# Altium PCB PCB四轴.PcbDoc
Units mm, origin at the board's own origin, x right, y up, seen from the top; angles counter-clockwise.
Board outline 100.25 x 100.25 mm, 2 copper layers (Top Layer, Bottom Layer); 60 components, 49 nets, 239 pads, 47 vias.
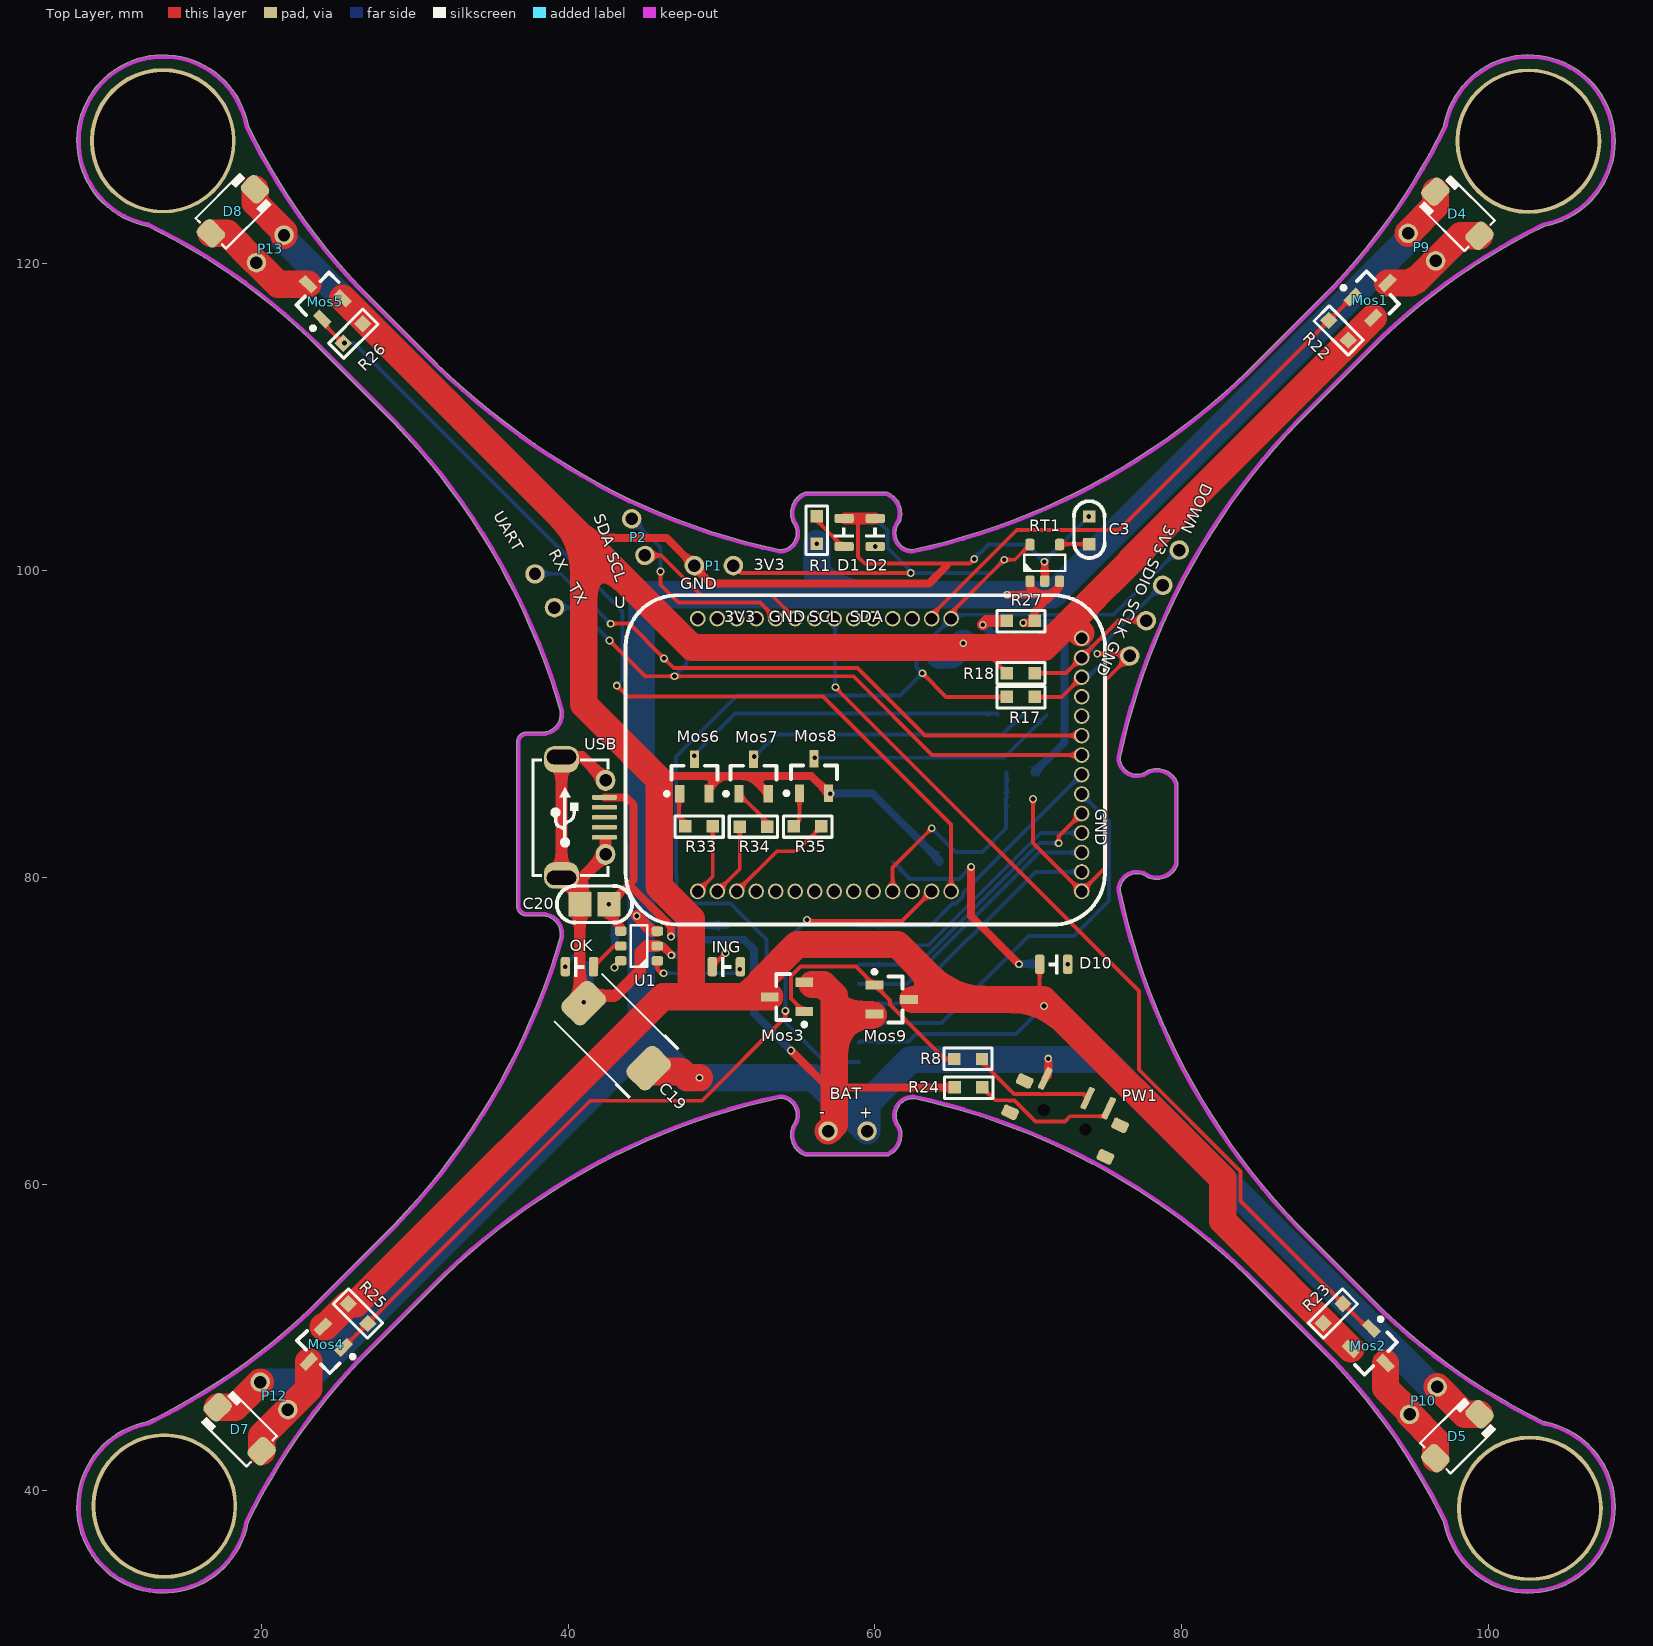
[diagram p0: Top Layer view]
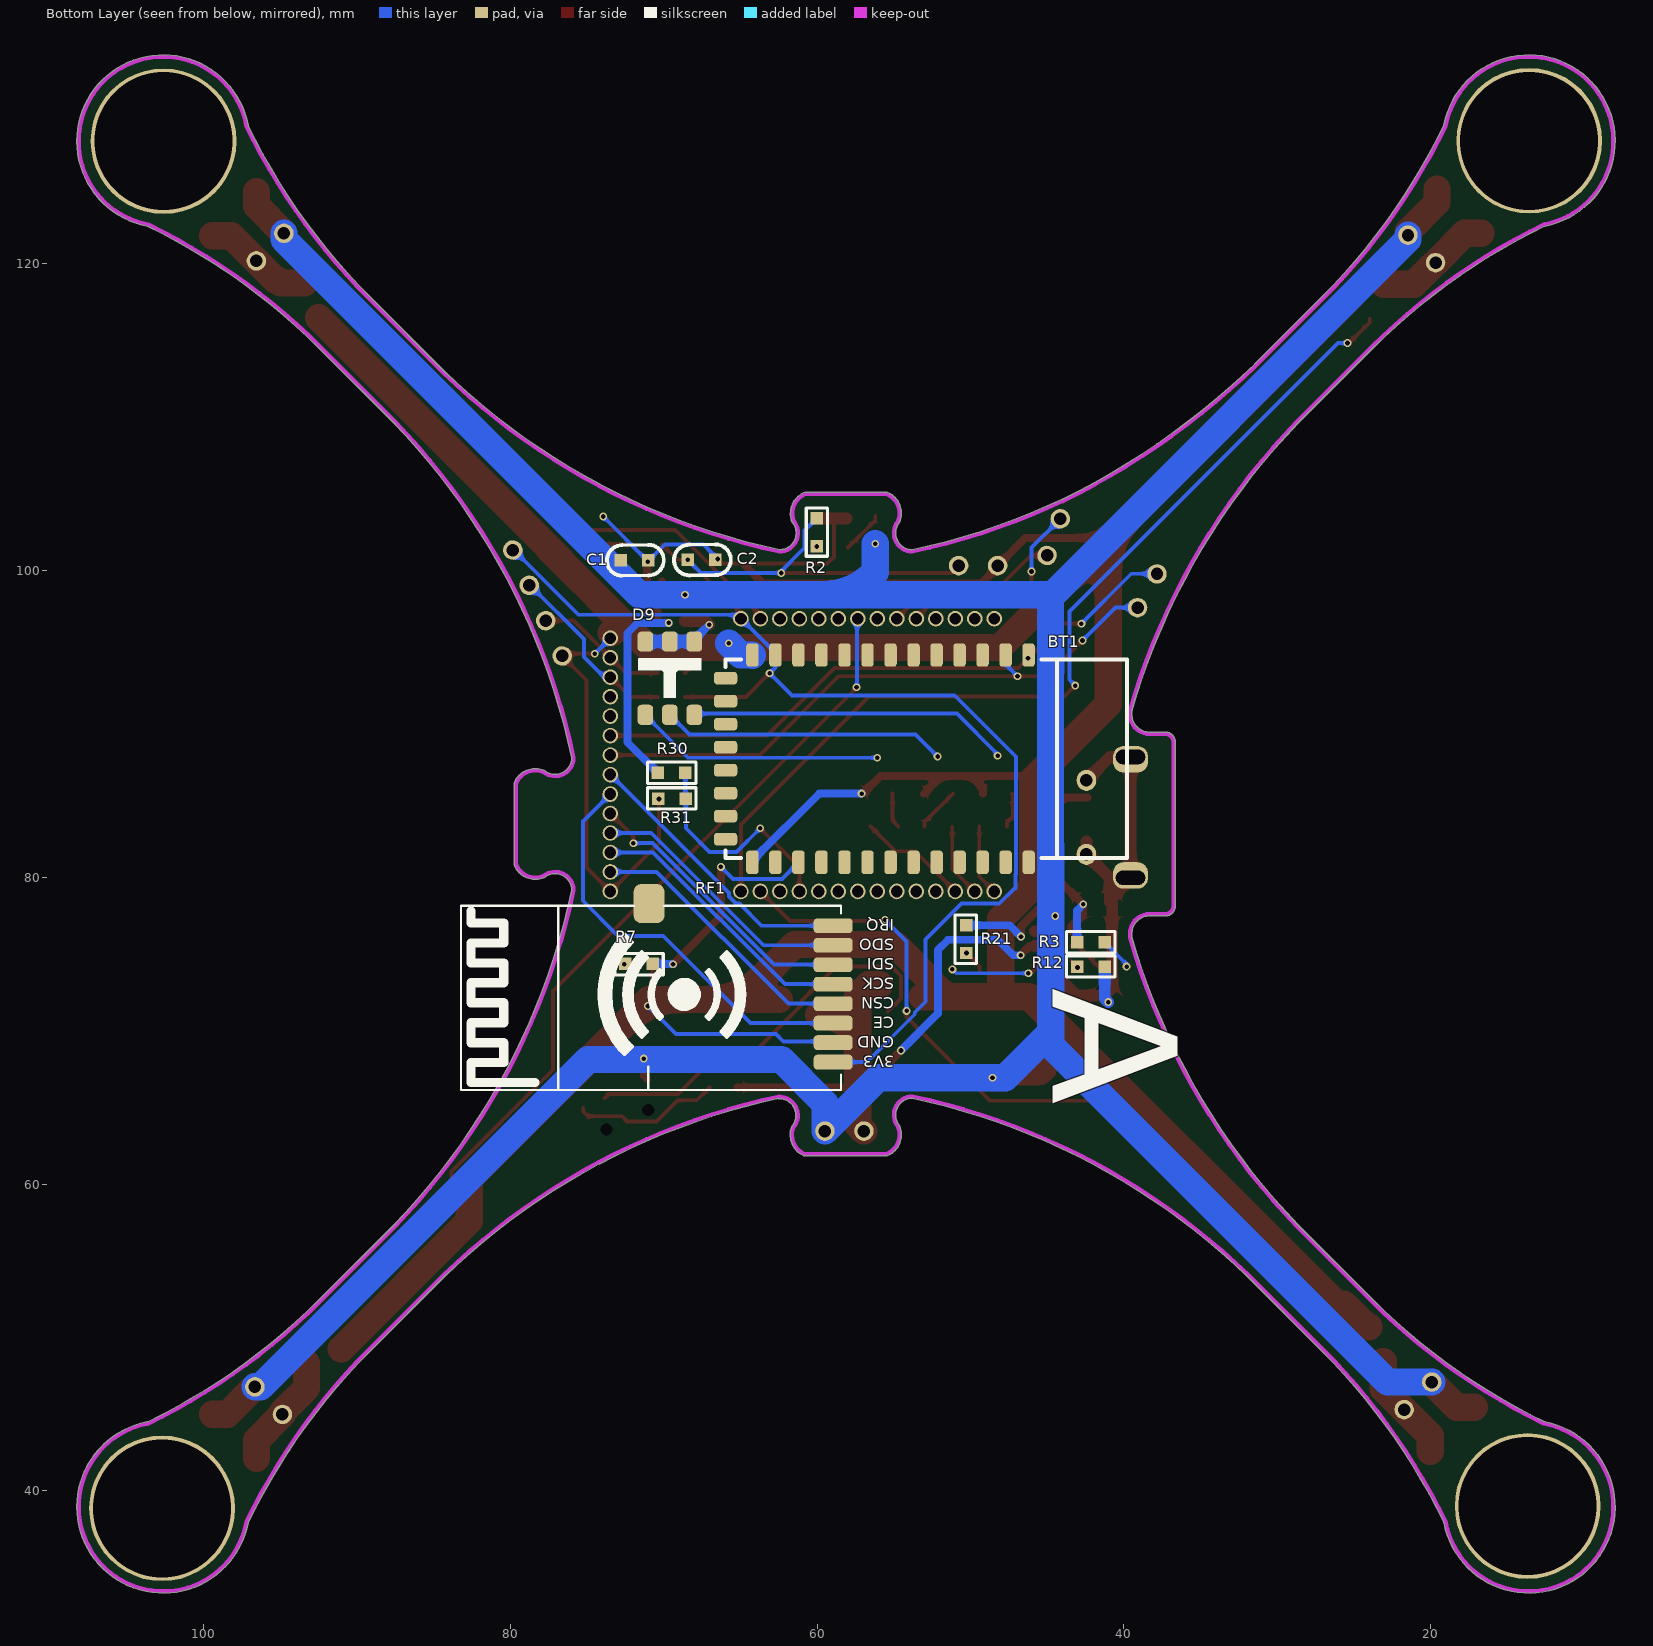
[diagram p1: Bottom Layer view, seen from below]

## Layer stack, top to bottom
Top Solder: solder mask 0.0102, Solder Resist, Dk 3.5
Top Layer: signal copper 0.0356
Dielectric1: dielectric 0.32, FR-4, Dk 4.8
Bottom Layer: signal copper 0.0356
Bottom Solder: solder mask 0.0102, Solder Resist, Dk 3.5

## Board outline
19.142,37.906 cw(c13.615,38.964) 12.568,44.493 cw(c12.641,44.389) 12.586,44.504 ccw(c-5.415,81.671) 23.786,52.469 ccw(c-5.415,81.671) 23.786,52.47 cw(c23.876,52.38) 23.787,52.47 23.786,52.47 28.635,57.319 28.634,57.318 ccw(c-3.645,88.488) 39.484,76.103 39.484,76.332 ccw(c38.342,76.332) 38.342,77.475 37.308,77.475 cw(c37.308,78.13) 36.652,78.13 36.652,88.798 cw(c37.308,88.798) 37.308,89.454 38.342,89.454 ccw(c38.342,90.597) 39.484,90.597 39.484,90.826 ccw(c-3.645,78.44) 28.634,109.611 ccw(c-3.645,78.44) 28.634,109.611 28.635,109.61 23.812,114.433 ccw(c-5.54,85.082) 12.561,122.437 cw(c13.615,127.964) 19.144,129.012 cw(c19.04,128.939) 19.155,128.994 ccw(c56.322,146.995) 27.12,117.794 ccw(c56.322,146.995) 27.121,117.794 ccw(c27.031,117.704) 27.12,117.794 27.121,117.794 31.469,113.445 31.468,113.446 ccw(c66.08,149.289) 43.944,104.65 cw(c43.949,104.522) 44.003,104.637 ccw(c63.139,145.225) 53.796,101.336 ccw(c53.783,102.432) 54.879,102.432 ccw(c53.783,102.432) 54.626,103.133 ccw(c53.783,102.432) 54.626,103.133 cw(c54.724,103.215) 54.605,103.169 cw(c55.989,103.704) 55.453,105.088 cw(c55.499,104.969) 55.5,105.096 60.742,105.096 cw(c60.743,104.969) 60.789,105.088 cw(c60.253,103.704) 61.737,103.704 cw(c60.253,103.704) 61.637,103.169 cw(c61.518,103.215) 61.615,103.133 ccw(c62.459,102.432) 62.435,101.336 ccw(c53.091,145.225) 84.262,112.946 ccw(c53.091,145.225) 84.262,112.946 84.261,112.945 89.11,117.794 cw(c89.2,117.704) 89.11,117.794 ccw(c59.758,147.146) 97.087,128.99 cw(c97.214,129) 97.088,129.024 cw(c102.615,127.964) 108.243,127.964 cw(c102.615,127.964) 103.663,122.435 cw(c103.589,122.539) 103.645,122.425 ccw(c121.646,85.257) 92.445,114.459 ccw(c121.646,85.257) 92.444,114.459 ccw(c92.354,114.549) 92.445,114.459 92.444,114.459 cw(c92.354,114.549) 92.444,114.458 92.444,114.459 87.595,109.61 87.596,109.611 cw(c119.875,78.44) 87.597,109.611 87.596,109.611 ccw(c119.875,78.44) 75.987,87.786 ccw(c77.083,87.796) 77.783,86.953 ccw(c77.083,87.796) 77.784,86.954 77.783,86.953 cw(c77.866,86.856) 77.82,86.974 cw(c78.355,85.591) 79.739,86.127 cw(c79.62,86.081) 79.747,86.081 cw(c79.62,86.081) 79.747,86.069 79.747,80.86 cw(c79.62,80.848) 79.747,80.848 cw(c79.62,80.848) 79.739,80.802 cw(c78.355,81.338) 77.82,79.954 cw(c77.866,80.073) 77.783,79.976 cw(c77.083,79.132) 77.784,79.975 77.783,79.976 ccw(c77.083,79.132) 75.987,79.143 ccw(c119.875,88.488) 87.596,57.318 ccw(c119.875,88.488) 87.597,57.317 87.595,57.319 92.444,52.47 cw(c92.354,52.38) 92.445,52.469 ccw(c121.796,81.822) 103.64,44.493 cw(c103.65,44.366) 103.674,44.491 cw(c102.615,38.964) 108.243,38.964 cw(c102.615,38.964) 97.086,37.917 cw(c97.19,37.991) 97.076,37.935 ccw(c59.908,19.934) 89.11,49.135 ccw(c59.908,19.934) 89.11,49.135 84.261,53.984 84.262,53.984 ccw(c53.091,21.704) 62.517,65.576 cw(c62.473,65.695) 62.473,65.568 ccw(c62.473,64.471) 61.629,63.771 ccw(c62.473,64.471) 61.63,63.77 61.629,63.771 cw(c61.532,63.689) 61.651,63.735 cw(c60.267,63.199) 61.751,63.199 cw(c60.267,63.199) 60.914,61.864 cw(c60.831,61.96) 60.831,61.833 55.51,61.833 cw(c55.499,61.96) 55.453,61.841 cw(c55.989,63.224) 54.605,63.76 cw(c54.724,63.714) 54.626,63.796 ccw(c53.783,64.497) 54.879,64.497 ccw(c53.783,64.497) 53.794,65.593 ccw(c63.139,21.704) 31.969,53.984 ccw(c63.139,21.704) 31.968,53.983 31.97,53.984 27.121,49.135 ccw(c27.031,49.226) 27.121,49.136 27.121,49.135 ccw(c56.472,19.784) 27.12,49.135 ccw(c56.472,19.784) 19.144,37.939 cw(c19.017,37.93) 19.144,37.93 cw(c19.017,37.93)

## Design rules (kind name [scope] priority, off if disabled: settings)
Clearance [All] p1: gap=0.152 ignorepadtopadclearanceinfootprint=FALSE except(0: Arc-Hole Track-Hole SMDPad-Hole THPad-Hole Via-Hole Fill-Hole Poly-Hole Region-Hole Text-Hole)
PlaneConnect [All] p1: planeconnectstyle=Direct reliefexpansion=0.508 reliefentries=4 reliefconductorwidth=0.254 reliefairgap=0.254
PolygonConnect [All] p1: connectstyle=Direct reliefconductorwidth=0.254 reliefentries=4 polygonreliefangle="90 Angle" airgapwidth=0.254
RoutingVias [All] p1: holewidth=0.305 width=0.508 viastyle="Through Hole" minholewidth=0.305 minwidth=0.508 maxholewidth=2.54 maxwidth=1.27
SilkToSilkClearance [All] p1: silktosilkclearance=0.152
SilkToSolderMaskClearance [IsPad] p1: minsilkscreentomaskgap=0.152 clearancetoexposedcopper=TRUE
SolderMaskExpansion [All] p1: expansion=0.102
Width [All] p1: maxlimit=2.54 minlimit=0.152 preferedwidth=0.254 minimp=50.000000 maximp=50.000000 favimp=50.000000
27 further rules are at their usual default settings.

## Classes and differential pairs
component class PCB四轴: BT1 CC1 D9 D10 DOWN Mos6 Mos7 Mos8 MPU1 P1 P2 R7 R17 R18 R27 R30 R31 R33 R34 R35 RF1 U UART
component class PCB四轴接口: BAT C1 C2 C3 C19 C20 D1 D2 D4 D5 D7 D8 ING Mos1 Mos2 Mos3 Mos4 Mos5 Mos9 OK P9 P10 P12 P13 PW1 R1 R2 R3 R8 R12 R21 R22 R23 R24 R25 R26 RT1 U1 USB

## Components (designator, comment, footprint, x,y, rotation, side; value= is the part's Value field where it differs from the comment)
BAT "HDR1x2_2.54" HDR1X2_2.54_90 59.487,63.449 r270 top
BT1 "Bluetooth_HC05" Bluetooth_HC05 65.964,87.721 r270 bottom
C1 "Cap_0603" CAP_0603 71.831,100.686 r0 bottom value=1u
C2 "Cap_0603" CAP_0603 67.462,100.711 r0 bottom value=0.1u
C3 "Cap_0603" CAP_0603 73.939,102.667 r270 top value=22n
C19 "Cap_Tan_2917" CAP_TAN_D2917 43.129,69.672 r135 top value=?F
C20 "Cap_0805" CAP_0805 41.749,78.207 r0 top value=?F
D1 "LED_0805" LED_0805_YELLOW 57.988,102.464 r90 top
D2 "LED_0805" LED_0805_YELLOW 60.02,102.464 r90 top
D4 "Diode_SMA" DO-214AC 97.968,123.241 r135 top value=SS34
D5 "Diode_SMA" DO-214AC 97.968,43.561 r45 top value=SS34
D7 "Diode_SMA" DO-214AC 18.593,44.018 r135 top value=SS34
D8 "Diode_SMA" DO-214AC 18.161,123.393 r45 top value=SS34
D9 "LED_5050_RGB" LED_5050_6P 69.596,92.964 r90 bottom
D10 "LED_0805" LED_0805_BLUE 71.653,74.32 r180 top
DOWN "HDR1x4_2.54" HDR1X4_2.54_90 79.832,101.321 r335 top
ING "LED_0805" LED_0805_RED 50.317,74.168 r0 top
Mos1 "MOSFET N" Nmos_SOT23 92.608,117.932 r45 top
Mos2 "MOSFET N" Nmos_SOT23 92.481,49.124 r315 top
Mos3 "MOSFET N" Nmos_SOT23 54.272,72.197 r180 top
Mos4 "MOSFET N" Nmos_SOT23 23.901,49.225 r225 top
Mos5 "MOSFET N" Nmos_SOT23 23.854,117.85 r135 top
Mos6 "MOSFET N" Nmos_SOT23 48.235,86.563 r90 top
Mos7 "MOSFET N" Nmos_SOT23 52.095,86.563 r90 top
Mos8 "MOSFET N" Nmos_SOT23 56.032,86.589 r90 top
Mos9 "MOSFET N" Nmos_SOT23 61.094,72.024 r0 top
OK "LED_0805" LED_0805_GREEN 40.742,74.168 r0 top
P1 "HDR1x2_2.54" HDR1X2_2.54_180 50.775,100.305 r270 top
P2 "HDR1x2_2.54" HDR1X2_2.54_180 44.145,103.353 r20 top
P9 "HDR1x2_2.54" HDR1X2_2.54_180 94.749,121.963 r45 top
P10 "HDR1x2_2.54" HDR1X2_2.54_180 96.64,46.779 r315 top
P12 "HDR1x2_2.54" HDR1X2_2.54_180 19.939,47.092 r45 top
P13 "HDR1x2_2.54" HDR1X2_2.54_180 21.488,121.844 r315 top
PW1 "SwitchSPDT_2.8x6.6_90" SwitchSPDT_2.8X6.6_90 72.365,64.186 r335 top
R1 "Res_0603" RES_0603 54.127,102.667 r90 top value=1K
R2 "Res_0603" RES_0603 57.937,102.438 r270 bottom value=1K
R3 "Res_0603" RES_0603 42.113,77.826 r180 bottom value=1.6K
R7 "Res_0603" RES_0603 71.653,72.263 r0 bottom value=500R
R8 "Res_0603" RES_0603 66.116,70.231 r0 top value=10K
R12 "Res_0603" RES_0603 42.113,76.251 r180 bottom value=1.6K
R17 "Res_0603" RES_0603 69.469,89.662 r180 top value=10K
R18 "Res_0603" RES_0603 69.469,91.211 r180 top value=10K
R21 "Res_0603" RES_0603 52.375,75.997 r90 bottom value=1.6K
R22 "Res_0603" RES_0603 88.724,114.198 r135 top value=10K
R23 "Res_0603" RES_0603 88.422,53.064 r45 top value=10K
R24 "Res_0603" RES_0603 66.065,64.211 r180 top value=10K
R25 "Res_0603" RES_0603 27.812,52.992 r315 top value=10K
R26 "Res_0603" RES_0603 27.433,113.92 r225 top value=10K
R27 "Res_0603" RES_0603 69.469,94.615 r180 top value=?K
R30 "Res_0603" RES_0603 69.52,84.734 r0 bottom value=10K
R31 "Res_0603" RES_0603 69.418,87.198 r180 bottom value=10K
R33 "Res_0603" RES_0603 48.489,81.229 r180 top value=?K
R34 "Res_0603" RES_0603 52.133,85.369 r0 top value=?K
R35 "Res_0603" RES_0603 55.575,81.229 r180 top value=?K
RF1 "NRF2401_优信" NRF24L01_YOUXIN 68.544,72.527 r0 bottom locked
RT1 "RT9193" SOT23-5 71.069,100.482 r90 top
U "Fly_Control_Core" FLY_CONTROL_CORE 58.776,89.51 r0 top locked
U1 "TP4059" SOT23-6 44.628,75.514 r180 top
UART "HDR1x2_2.54" HDR1X2_2.54_180 37.846,99.761 r30 top
USB "USB_Micro" USB_Micro-AB 39.827,83.896 r90 top

## Footprints (in the part's own frame and the unit in brackets; to place one, negate y for a bottom-side part, rotate by r counter-clockwise, add the part's x,y. Pads: shape width x height; smd on the part's side, far side on the other; paste and mask are expansions set on the pad)
Bluetooth_HC05 [mil]
  rrect50% 60x32 smd: 1(-265.91,777.56) 2(-265.91,718.5) 3(-265.91,659.45) 4(-265.91,600.39) 5(-265.91,541.34) 6(-265.91,482.28) 7(-265.91,423.23) 8(-265.91,364.17) 9(-265.91,305.12) 10(-265.91,246.06) 11(-265.91,187.01) 12(-265.91,127.95) 13(-265.91,68.9) 22(265.91,68.9) 23(265.91,127.95) 24(265.91,187.01) 25(265.91,246.06) 26(265.91,305.12) 27(265.91,364.17) 28(265.91,423.23) 29(265.91,482.28) 30(265.91,541.34) 31(265.91,600.39) 32(265.91,659.45) 33(265.91,718.5) 34(265.91,777.56)
  rrect50% 32x60 smd: 14(-206.69,0) 15(-147.64,0) 16(-88.58,0) 17(-29.53,0) 18(29.53,0) 19(88.58,0) 20(147.64,0) 21(206.69,0)
  silkscreen extent -255,0 255,1030, body extent -276,0 276,1103, height 93
CAP_0603 [mil]
  rect 32x32 smd: 1(-33,1) 2(38,1)
  silkscreen extent -72,-38 73,41, body extent -33,-15 30,17, height 31
CAP_0805 [mm]
  rect 1.5x1.6 smd: 1(-0.977,0.025) 2(0.923,0.025)
  silkscreen extent -2.48,-1.17 2.42,1.23, body extent -1.08,-0.64 0.92,0.62, height 1
CAP_TAN_D2917 [mil]
  rrect50% 80x106 smd: 1(-118,0) 2(118,0)
  silkscreen extent -138,-92 138,92, body extent -150,-78 150,78, height 122
DO-214AC [mil] "SMA"
  rrect50% 55x65 smd: 1(-80,0) 2(80,0)
  silkscreen extent -80,-55 80,55, body extent -98,-53 98,53, height 85
FLY_CONTROL_CORE [mil]
  round 40 hole 30: 1(-406.44,288.88) 2(-356.44,288.88) 3(-306.44,288.88) 4(-256.44,288.88) 5(-206.44,288.88) 6(-156.44,288.88) 7(-106.44,288.88) 8(-56.44,288.88) 9(-6.44,288.88) 10(43.56,288.88) 11(93.56,288.88) 12(143.56,288.88) 13(193.56,288.88) 14(243.56,288.88) 15(-406.44,-411.11) 16(-356.44,-411.11) 17(-306.44,-411.11) 18(-256.44,-411.11) 19(-206.44,-411.12) 20(-156.44,-411.12) 21(-106.44,-411.12) 22(-56.44,-411.12) 23(-6.44,-411.12) 24(43.56,-411.12) 25(93.56,-411.12) 26(143.56,-411.12) 27(193.56,-411.12) 28(243.56,-411.12) 29(578.56,238.88) 30(578.56,188.88) 31(578.56,138.88) 32(578.56,88.88) 33(578.56,38.88) 34(578.56,-11.12) 35(578.55,-61.12) 36(578.55,-111.12) 37(578.55,-161.12) 38(578.55,-211.12) 39(578.55,-261.12) 40(578.55,-311.12) 41(578.55,-361.12) 42(578.55,-411.12)
  silkscreen extent -591,-496 639,349, body extent -598,-502 642,353, height 197
HDR1X2_2.54_90 [mil]
  round 50 hole 32: 1(0,0) 2(0,-100)
  body extent -15,-146 424,46, height 99
HDR1X2_2.54_180 [mil]
  round 50 hole 32: 1(0,0) 2(0,-100)
  body extent -49,-150 49,50, height 323
HDR1X4_2.54_90 [mil]
  round 50 hole 32: 1(0,0) 2(0,-100) 3(0,-200) 4(0,-300)
  body extent -15,-346 424,46, height 99
LED_0805_BLUE [mil]
  rrect50% 24x50 smd: 1(-36,0) 2(36,0)
  silkscreen extent -12,-24 12,24, body extent -40,-25 40,25, height 43
LED_0805_GREEN [mil]
  rrect50% 24x50 smd: 1(-36,0) 2(36,0)
  silkscreen extent -12,-24 12,24, body extent -40,-25 40,25, height 43
LED_0805_RED [mil]
  rrect50% 24x50 smd: 1(-36,0) 2(36,0)
  silkscreen extent -12,-24 12,24, body extent -40,-25 40,25, height 43
LED_0805_YELLOW [mil]
  rrect50% 24x50 smd: 1(-36,0) 2(36,0)
  silkscreen extent -12,-24 12,24, body extent -40,-25 40,25, height 43
LED_5050_6P [mil]
  rrect50% 52x40 smd: 1(-94,62.99) 2(-94,0) 3(-94,-62.99) 4(94,-62.99) 5(94,0) 6(94,62.99)
  silkscreen extent -50,-80 50,80, body extent -104,-98 104,98, height 63
Nmos_SOT23 [mm]
  rect 1.15x0.6 smd: D(1.125,0) G(-1.125,0.95) S(-1.125,-0.95)
  silkscreen extent -1.25,-1.5 0.7,1.92, body extent -0.7,-1.5 0.7,1.5, height 1.14
NRF24L01_YOUXIN [mil]
  rrect50% 100x38 smd: 1(-377.57,180.39) 2(-377.57,130.39) 3(-377.57,80.39) 4(-377.57,30.39) 5(-377.57,-19.61) 6(-377.57,-69.61) 7(-377.57,-119.61) 8(-377.57,-169.61)
  rrect50% 80x100 smd: 9(94.68,-226.31)
  silkscreen extent -398,-221 577,252, body extent -383,-235 582,265, height 46
RES_0603 [mil]
  rect 32x32 smd: 1(-37,-82) 2(34,-82)
  silkscreen extent -64,-109 60,-54, body extent -31,-98 31,-66, height 18
SOT23-5 [mil]
  rrect50% 30x24 smd: 1(-47,38) 2(-47,0) 3(-47,-38) 4(47,-38) 5(47,38)
  silkscreen extent -21,-53 21,53, body extent -55,-57 55,57, height 57
SOT23-6 [mil]
  rrect50% 30x24 smd: 1(-47,38) 2(-47,0) 3(-47,-38) 4(47,-38) 5(47,0) 6(47,38)
  silkscreen extent -21,-53 21,53, body extent -55,-57 55,57, height 57
SwitchSPDT_2.8X6.6_90 [mil]
  rrect50% 42x30 smd: 0(-135,-42) 0(-135,47) 0(135,-42) 0(135,47)
  round 10 hole 31.5: 0(-59.06,0) 0(59.06,0)
  rrect50% 16x60 smd: 1(90,75) 2(30,75) 3(-90,75)
  body extent -152,-111 151,86, height 55
USB_Micro-AB [mil]
  rrect80% 68x90 hole 37 slot 75 at 90 deg copper offset 6,0 mask+0: 0(-155,10)
  oval 54x50 hole 32 mask+0: 0(-95,-103) 0(95,-103)
  rrect80% 68x90 hole 37 slot 75 at 90 deg copper offset -6,0 mask+0: 0(155,10)
  rrect50% 12x64 smd: 1(51.18,-100) 2(25.59,-100) 3(0,-100) 4(-25.59,-100) 5(-51.18,-100)
  silkscreen extent -150,-113 150,86, body extent -161,-109 161,104, height 108

## Part data
BAT DOWN P1 P2 UART: "Header"
BT1: "Module"
C1 C2 C3 C19 C20: "Capacitor"
D1 D2 D9 D10 ING OK: "LED"
D4 D5 D7 D8: "Diode"
Mos1 Mos2 Mos3 Mos4 Mos5 Mos6 Mos7 Mos8 Mos9: "MOS SOT23"
P9 P10 P12 P13: library part HDR1x2_2.54T, "Header"
PW1: "Switch"
R1 R2 R3 R7 R8 R12 R17 R18 R21 R22 R23 R24 R25 R26 R27 R30 R31 R33 R34 R35: "Resistor"
RT1: "Power"
USB: "USB"

## Free pads (board coordinates)
  round 9.5 hole 9: 0(13.589,127.991) 0(13.691,39.014) 0(102.591,127.965) 0(102.692,38.862)

## Via types
v1: diameter 0.508, hole 0.305, Top Layer to Bottom Layer, 47 vias

## Nets (pads, with @x,y where several pads share a name; then routed paths per layer and width w, separated by ;. In a path a pad name is that pad's centre, name@x,y a point inside that pad or via, vN(x,y) a via of type N, cw(c..) or ccw(c..) an arc to the next point about the centre after c; other vN are vias at no path point)
3V3: BT1.12 C2.2 DOWN.1 P1.1 R2.1 R17.2 RF1.1 RT1.5 U.14 | length 103.5
  Top Layer w0.254: P1.1 51.257,99.822 v1(62.332,99.822) ; v1(63.094,93.294) 64.643,91.745 R17.2 ; U.14 64.962,97.22 v1(68.428,100.686) 69.113,100.686 RT1.5
  Bottom Layer w0.254: RF1.1 56.751,67.945 53.632,71.064 53.632,71.183 52.934,71.882 52.934,75.946 50.6,78.28 48.126,78.28 47.107,79.299 47.066,79.299 47.066,80.17 47.028,80.208 47.028,87.846 51.029,91.846 61.646,91.846 v1(63.094,93.294) 62.714,93.674 BT1.12 62.714,94.599 U.14 65.219,97.104 75.551,97.104 79.768,101.321 DOWN.1 ; R2.1 60.814,102.584 60.814,101.466 62.459,99.822 67.564,99.822 v1(68.428,100.686)
ADC: R30.1 R31.2 U.25 | length 15
  Top Layer w0.254: U.25 61.152,80.634 v1(63.703,83.185)
  Bottom Layer w0.254: v1(63.703,83.185) 65.253,81.636 67.005,81.636 68.555,83.185 R31.2 68.58,85.141 R30.1
BGND: BAT.2 C19.2 C20.1 Mos3.S Mos9.S R12.2 R24.2 U1.2 USB.0 USB.5 | length 73.7
  Top Layer w0.508: U1.2 46.177,75.514 46.736,74.955 v1(46.736,74.905) ; v1(54.534,68.707) 57.328,65.913 57.353,65.913 57.734,66.294 R24.2
  Top Layer w0.762: 42.443,82.347 42.443,81.483 40.919,79.959 40.919,78.379 C20.1 ; USB.0@42.443,86.309 40.919,87.833 39.573,87.833 39.573,79.959 40.772,78.76 C20.1 ; U1.2 45.11,75.514 44.704,75.108 44.704,73.914 43.064,72.274 41.289,72.274 40.772,72.791 C20.1
  Top Layer w1.778: Mos3.S@55.898,73 56.642,73 57.353,72.288 57.353,71.018 ; BAT.2 57.353,63.856 57.353,65.913 57.353,71.018 ; Mos9.S@59.914,71.018 57.353,71.018
  Bottom Layer w0.508: v1(46.736,74.905) 47.219,74.905 48.235,75.921 51.46,75.921 52.121,75.26 52.121,71.12 v1(54.534,68.707)
  Bottom Layer w0.762: v1(41.021,71.857) 41.25,72.085 R12.2
CE: RF1.3 U.37 | length 27.3
  Bottom Layer w0.254: RF1.3 64.338,70.485 70.028,76.175 72.974,76.175 75.26,78.461 75.26,83.628 U.37
CH1: Mos1.G R22.2 U.13 | length 36.3
  Top Layer w0.254: U.13 63.692,97.068 69.179,102.554 69.2,102.554 69.262,102.616 75.921,102.616 R22.2 91.113,117.808 Mos1.G
CH2: Mos2.G R23.2 U.8 | length 61
  Top Layer w0.254: v1@57.342,92.442 77.205,72.579 77.205,67.45 83.833,60.822 83.833,58.89 92.132,50.591 Mos2.G
  Bottom Layer w0.254: U.8 57.4,96.79 57.4,92.41 v1(57.429,92.38)
CH3: Mos4.G R25.2 U.27 | length 53.6
  Top Layer w0.254: Mos4.G 41.45,65.43 48.719,65.43 54.165,70.877 v1(54.165,71.285) ; v1(55.575,77.216) 55.647,77.144 61.769,77.144 U.27
  Bottom Layer w0.254: v1(54.165,71.285) 54.165,75.806 v1(55.575,77.216)
CH4: Mos5.G R26.2 U.28 | length 62.4
  Top Layer w0.254: Mos5.G 23.978,116.154 R26.2 ; v1(43.18,92.481) 43.891,91.77 56.617,91.77 64.962,83.425 U.28
  Bottom Layer w0.254: v1(25.425,114.808) 26.06,114.808 43.561,97.307 43.561,92.862 v1(43.18,92.481)
CSN: RF1.4 U.41 | length 18.1
  Bottom Layer w0.254: RF1.4 61.874,71.755 70.457,80.337 U.41
GND: BT1.13 BT1.22 C1.1 C2.1 C3.1 D1.2 D2.2 D10.2 DOWN.4 Mos1.S Mos2.S Mos3.D Mos4.S Mos5.S Mos6.S Mos7.S Mos8.S Mos9.D P1.2 R18.2 R22.1 R23.1 R25.1 R26.1 R31.1 RF1.2 RT1.2 U.29 U.42 | length 334.4
  Top Layer w0.254: P1.2@48.235,100.2 P1.2 ; 58.852,103.378 58.903,103.327 58.903,100.863 59.334,100.432 66.167,100.432 v1(66.472,100.736) ; 67.488,94.971 67.488,94.412 R18.2 ; v1(70.307,85.09) 70.307,82.231 U.42 75.032,80.628 75.032,92.834 DOWN.4 76.462,94.564 v1(74.484,94.564) ; D10.2 70.739,72.263 70.978,72.024
  Top Layer w0.508: 41.021,102.108 46.431,102.108 P1.2 ; 45.943,86.34 46.192,86.589 49.962,86.589 ; P1.2@48.235,100.2 49.299,99.136 63.525,99.136 64.681,100.292 ; Mos6.S 49.185,85.811 49.962,86.589 ; Mos7.S 51.895,86.589 ; Mos8.S 55.857,86.589 51.895,86.589 ; v1(71.044,100.559) 71.069,100.533 RT1.2 ; 49.962,86.589 51.895,86.589
  Top Layer w0.762: D1.2@58.064,103.378 58.852,103.378 D2.2
  Top Layer w1.778: Mos4.S 24.182,50.692 R25.1 26.177,52.184 46.19,72.197 47.854,72.197 ; Mos5.S 41.021,102.026 ; 41.021,102.108 41.021,102.026 ; Mos3.D 51.547,72.197 ; Mos9.D@62.459,72.024 65.06,72.024 ; U.29@73.419,95.908 72.898,96.43 72.898,96.825 ; 76.618,100.598 Mos1.S ; 77.521,101.448 72.898,96.825 ; Mos2.S 82.664,57.597 82.664,60.338 70.978,72.024 65.06,72.024 ; 41.021,102.026 41.021,91.262 45.943,86.34 45.943,79.385 48.031,77.297 48.031,72.375 47.854,72.197 ; 41.021,102.026 48.077,94.971 67.488,94.971 71.044,94.971 72.898,96.825 ; 47.854,72.197 51.547,72.197 ; 51.547,72.197 51.841,72.492 51.879,72.492 52.578,73.191 52.578,73.25 54.944,75.616 60.908,75.616 60.916,75.607 61.477,75.607 65.06,72.024
  Bottom Layer w0.254: RF1.2 59.03,69.291 62.205,69.291 62.687,69.774 69.19,69.774 v1(71.018,71.603) ; v1(66.472,100.736) 67.412,101.676 69.926,101.676 v1(71.044,100.559) 71.044,100.609 v1(73.939,103.505) ; U.29 v1(74.484,94.564) v1@74.6,94.564
  Bottom Layer w0.508: v1(57.099,85.446) 59.859,85.446 64.214,81.091 BT1.22
  Bottom Layer w1.778: BT1.13@64.228,94.461 64.242,94.475 64.986,94.475 v1(65.761,95.25)
IRQ: RF1.8 U.36 | length 18.7
  Bottom Layer w0.254: RF1.8 63.619,76.835 65.063,78.28 65.288,78.28 65.749,78.741 65.749,78.966 U.36
LED1: D9.3 Mos6.D | length 21
  Bottom Layer w0.254: v1(48.235,87.909) 48.235,88.011 50.88,90.657 67.996,90.657 D9.3
LED2: D9.2 Mos7.D | length 18.6
  Bottom Layer w0.254: v1(52.146,87.859) 53.573,89.285 68.305,89.285 D9.2
LED3: D9.1 Mos8.D | length 16.3
  Bottom Layer w0.254: v1(56.083,87.782) 68.402,87.782 D9.1
MISO: RF1.7 U.39 | length 17.5
  Bottom Layer w0.254: RF1.7 63.494,75.565 70.806,82.877 U.39
MOSI: RF1.6 U.38 | length 18.9
  Top Layer w0.254: v1(71.971,82.207) 71.971,82.647 U.38
  Bottom Layer w0.254: RF1.6 62.798,74.295 70.723,82.22 71.958,82.22 v1(71.971,82.207) v1@71.984,82.194
NetBT1_24: BT1.24 R7.1 | length 14.8
  Top Layer w0.508: v1(66.269,80.67) 66.269,77.445 v1(69.393,74.32)
  Bottom Layer w0.254: BT1.24 62.298,79.883 65.481,79.883 v1(66.269,80.67)
  Bottom Layer w0.508: v1(69.393,74.32) 69.418,74.346 R7.1
NetC3_2: C3.2 RT1.4 | length 1.9
  Top Layer w0.254: RT1.4 72.06,101.702 C3.2
NetD1_1: D1.1 R1.2 | length 2.8
  Top Layer w0.254: R1.2 56.21,103.251 D1.1@57.988,101.473
NetD2_1: D2.1 R2.2
  other v1: 60.02,101.549
NetD4_1: D4.1 Mos1.D P9.2 | length 7.3
  Top Layer w1.778: Mos1.D 94.977,118.728 95.155,118.905 95.283,118.905 P9.2 98.182,121.804 D4.1
NetD5_1: D5.1 Mos2.D P10.2 | length 7.6
  Top Layer w1.778: Mos2.D 93.277,46.704 94.844,45.137 P10.2 96.531,43.296 D5.1
NetD7_1: D7.1 Mos4.D P12.2 | length 7.1
  Top Layer w1.778: D7.1 20.03,43.59 P12.2 23.106,46.666 Mos4.D
NetD8_1: D8.1 Mos5.D P13.2 | length 7.7
  Top Layer w1.778: D8.1 17.784,121.956 P13.2 19.699,120.048 21.102,118.646 Mos5.D
NetD9_4: D9.4 D9.5 D9.6 R27.2 | length 6.4
  Top Layer w0.762: v1(67.031,96.444) 67.285,96.698 R27.2
  Bottom Layer w0.508: v1(67.031,96.444) 67.996,95.478 D9.4
  Bottom Layer w0.762: D9.4 D9.6
NetD10_1: D10.1 R7.2
  other v1: 72.568,74.32
NetING_1: ING.1 R21.1 | length 1.5
  Top Layer w0.254: ING.1@49.403,73.939 ING.1 49.403,74.193 v1(50.267,75.057)
NetING_2: ING.2 U1.1 | length 6.1
  Top Layer w0.254: U1.1 45.822,73.965 46.05,73.736 v1(46.228,73.736)
  Bottom Layer w0.254: v1(46.228,73.736) 50.927,73.736 v1(51.181,73.99)
NetMos3_G: Mos3.G Mos9.G R8.1 | length 16.2
  Top Layer w0.254: Mos3.G 54.543,72.101 54.543,73.563 55.148,74.168 58.775,74.168 Mos9.G 60.985,71.958 60.985,71.704 64.541,68.148 R8.1
NetMos6_G: Mos6.G R33.2 | length 2.3
  Top Layer w0.254: Mos6.G 47.244,85.398 47.244,83.947 47.625,83.566 R33.2
NetMos7_G: Mos7.G R34.2 | length 2.9
  Top Layer w0.254: Mos7.G 52.997,83.586 R34.2
NetMos8_G: Mos8.G R35.2 | length 2.3
  Top Layer w0.254: R35.2 55.082,83.683 Mos8.G
NetOK_1: OK.1 R3.2 | length 2.2
  Bottom Layer w0.254: v1(39.827,74.168) 39.827,74.32 R3.2
NetPW1_1: PW1.1 R24.1 | length 9.6
  Top Layer w0.254: R24.1 67.84,65.459 68.733,65.459 68.738,65.454 69.106,65.454 70.476,64.084 72.39,64.084 72.72,64.414 74.93,64.414 75.242,64.726 PW1.1
NetR12_1: R12.1 U1.6 | length 0.6
  Top Layer w0.254: v1(43.028,74.117) 43.028,74.143 U1.6
RXD: BT1.1 U.34 UART.1 | length 40
  Top Layer w0.254: v1@42.799,96.52 43.993,96.52 v1(46.253,94.259) 46.888,93.624 58.877,93.624 63.274,89.227 U.34
  Bottom Layer w0.254: UART.1@37.821,99.771 39.522,99.771 v1(42.774,96.52)
SCL: P2.2 U.6 | length 11.5
  Top Layer w0.254: P2.2 46.075,100.966 48.666,98.374 53.275,98.374 U.6
SCLK: RF1.5 U.40 | length 18.1
  Bottom Layer w0.254: RF1.5 62.103,73.025 70.685,81.607 U.40
SDA: P2.1 U.5 | length 13.5
  Top Layer w0.254: v1(46.025,99.924) 46.025,99.06 47.193,97.892 52.502,97.892 53.532,96.861 U.5
  Bottom Layer w0.254: P2.1 46.025,101.473 v1(46.025,99.924)
STDBY: OK.2 U1.5 | length 2.3
  Top Layer w0.254: OK.2 43.002,75.514 U1.5
SWCLK: DOWN.3 R18.1 U.30 | length 8.7
  Top Layer w0.254: R18.1 72.458,93.294 U.30 75.88,96.717 DOWN.3
SWDIO: DOWN.2 R17.1 U.31 | length 12
  Top Layer w0.254: R17.1 72.179,91.745 U.31
  Bottom Layer w0.254: U.31 73.886,93.037 75.184,94.336 75.184,95.508 78.694,99.019 DOWN.2
TIM5_CH1: R33.1 U.15 | length 4.6
  Top Layer w0.254: U.15 49.428,80.044 R33.1
TIM5_CH2: R34.1 U.16 | length 4.8
  Top Layer w0.254: U.16 51.194,80.539 R34.1
TIM5_CH3: R35.1 U.17 | length 7.3
  Top Layer w0.254: U.17 53.611,81.686 54.889,81.686 R35.1
TXD: BT1.2 U.35 UART.2 | length 40.1
  Top Layer w0.254: v1(42.697,95.428) 45.06,93.066 45.085,93.091 v1(46.939,93.091) 58.598,93.091 63.732,87.957 U.35
  Bottom Layer w0.254: UART.2@39.091,97.571 40.554,97.571 v1(42.697,95.428) ; v1(46.939,93.091) 47.714,93.866 BT1.2
VBAT: BAT.1 C1.2 C19.1 D4.2 D5.2 D7.2 D8.2 P9.1 P10.1 P12.1 P13.1 PW1.3 R1.1 R27.1 R30.2 RT1.1 RT1.3 U1.3 | length 268.4
  Top Layer w0.508: v1(68.605,98.4) 70.612,98.4 ; v1(69.672,96.571) 70.282,96.571 R27.1 70.409,97.307 71.501,98.4 ; RT1.1 70.104,98.908 70.612,98.4 ; PW1.3 71.298,67.078 v1(71.298,68.174) ; RT1.3 72.034,98.933 71.501,98.4 ; 70.612,98.4 71.501,98.4
  Top Layer w0.762: v1(44.475,77.47) 45.466,76.479 U1.3
  Top Layer w1.778: D7.2 18.302,45.455 P12.1 ; D8.2 19.598,123.968 21.488,122.077 P13.1 ; C19.1 45.466,67.335 47.396,67.335 47.803,66.929 v1(48.565,66.929) ; P9.1 96.531,123.745 D4.2 ; P10.1 98.426,44.993 D5.2@99.4,44.993
  Bottom Layer w0.508: v1(69.672,96.571) 71.679,96.571 72.365,95.885 72.365,88.798 R30.2
  Bottom Layer w1.778: P12.1 22.809,47.092 44.766,69.048 44.766,69.901 ; P13.1 21.488,121.561 44.602,98.447 ; v1(56.21,101.727) 56.21,99.87 57.683,98.397 ; P9.1 94.749,121.569 71.577,98.397 57.683,98.397 ; P10.1 96.27,46.779 74.926,68.123 62.332,68.123 59.487,65.278 BAT.1 56.007,66.929 v1(48.565,66.929) 47.738,66.929 44.766,69.901 ; 44.766,69.901 44.766,82.041 44.788,82.064 44.788,93.378 44.766,93.401 44.766,95.549 44.788,95.572 44.788,98.397 57.683,98.397
VIN: PW1.2 R8.2 | length 8.1
  Top Layer w0.254: R8.2 66.98,67.945 69.065,65.86 70.649,65.86 70.653,65.857 70.77,65.857 70.773,65.854 71.068,65.854 71.074,65.86 73.59,65.86 PW1.2
VUSB: C20.2 R3.1 R21.2 U1.4 USB.1 | length 22.4
  Top Layer w0.508: USB.1 43.785,85.196 44.272,84.709 44.272,79.832 43.955,79.515 ; U1.4 43.434,76.784 42.672,77.546 C20.2 43.955,79.515 ; v1(46.711,76.124) 46.711,76.785 43.981,79.515 43.955,79.515
  Bottom Layer w0.508: v1(42.647,78.232) 43.053,77.826 R3.1 ; v1(46.711,76.124) 47.447,76.86 R21.2
pads on no net: BT1.3 BT1.4 BT1.5 BT1.6 BT1.7 BT1.8 BT1.9 BT1.10 BT1.11 BT1.14 BT1.15 BT1.16 BT1.17 BT1.18 BT1.19 BT1.20 BT1.21 BT1.23 BT1.25 BT1.26 BT1.27 BT1.28 BT1.29 BT1.30 BT1.31 BT1.32 BT1.33 BT1.34 PW1.0 RF1.9 U.1 U.2 U.3 U.4 U.7 U.9 U.10 U.11 U.12 U.18 U.19 U.20 U.21 U.22 U.23 U.24 U.26 U.32 U.33 USB.2 USB.3 USB.4

## Keep-outs
Keep-Out Layer:
  lines w0.254: 12.609,122.555 cw(c-5.54,85.082) 23.902,114.524 28.725,109.7 cw(c-3.645,78.44) 39.612,90.844 39.612,90.597 cw(c38.342,90.597) 38.342,89.327 37.308,89.327 ccw(c37.308,88.798) 36.779,88.798 36.779,78.13 ccw(c37.308,78.13) 37.308,77.602 38.342,77.602 cw(c38.342,76.332) 39.612,76.332 39.612,76.085 cw(c-3.645,88.488) 28.725,57.229 23.876,52.38 cw(c-5.415,81.671) 12.641,44.389 ; 12.609,122.557 cw(c13.615,127.964) 19.029,128.933 ; 12.643,44.378 ccw(c13.615,38.964) 19.017,37.93 ; 18.999,37.933 cw(c56.472,19.784) 27.031,49.226 31.88,54.074 cw(c63.139,21.704) 53.783,65.721 ; 19.04,128.939 ccw(c56.322,146.995) 27.031,117.704 31.379,113.355 ccw(c66.08,149.289) 43.988,104.486 ; 43.949,104.522 ccw(c63.139,145.225) 53.783,101.208 ccw(c53.783,102.432) 54.724,103.215 cw(c55.989,103.704) 55.499,104.969 60.743,104.969 cw(c60.253,103.704) 61.518,103.215 ccw(c62.459,102.432) 62.459,101.208 ; 53.783,65.72 cw(c53.783,64.497) 54.724,63.714 ccw(c55.989,63.224) 55.499,61.96 ; 55.499,61.96 60.831,61.96 ; 60.831,61.965 ccw(c60.267,63.199) 61.532,63.689 cw(c62.473,64.471) 62.473,65.695 ; 62.447,65.721 cw(c53.091,21.704) 84.351,54.074 89.2,49.226 cw(c59.908,19.934) 97.19,37.991 ; 62.447,101.209 ccw(c53.091,145.225) 84.351,112.855 89.2,117.704 ccw(c59.758,147.146) 97.231,128.996 ; 75.859,79.132 ccw(c119.875,88.488) 87.505,57.229 92.354,52.38 ccw(c121.796,81.822) 103.647,44.348 ; 75.859,87.796 cw(c119.875,78.44) 87.505,109.7 92.354,114.549 cw(c121.646,85.257) 103.589,122.539 ; 75.859,79.132 cw(c77.083,79.132) 77.866,80.073 ccw(c78.355,81.338) 79.62,80.848 ; 75.859,87.796 ccw(c77.083,87.796) 77.866,86.856 cw(c78.355,85.591) 79.62,86.081 ; 79.619,80.848 79.619,86.081 ; 97.202,37.993 ccw(c102.615,38.964) 103.65,44.366 ; 97.214,129 cw(c102.615,127.964) 103.587,122.551

## Silkscreen, mask and mechanical layers (free items; w line width, h text height)
Top Overlay:
  text "SDA" at 41.631,103.53 h0.76 r290
  text "3V3" at 78.943,103.048 h0.76 r245
  text "RX" at 38.71,101.117 h0.76 r300
  text "SCL" at 42.494,101.016 h0.76 r290
  text "SDIO" at 77.953,100.889 h0.76 r245
  text "3V3" at 52.095,100 h0.76
  text "TX" at 39.98,98.882 h0.76 r300
  text "GND" at 47.32,98.755 h0.76
  text "SCLK" at 76.683,98.222 h0.76 r245
  text "3V3" at 50.19,96.622 h0.76
  text "GND" at 53.086,96.622 h0.76
  text "SCL" at 55.677,96.622 h0.76
  text "SDA" at 58.369,96.622 h0.76
  text "GND" at 75.413,95.479 h0.76 r245
  text "GND" at 74.346,84.455 h0.76 r270
  text "-" at 56.388,64.364 h0.76
  text "+" at 58.979,64.287 h0.76
Bottom Overlay:
  text "A" at 47.32,72.796 h13.97 r90

## Text inside footprints (layer, text, board x,y; h text height)
RF1: Bottom Overlay "GND" at 54.96,69.634 h0.76 r180; Bottom Overlay "IRQ" at 54.96,77.256 h0.76 r180; Bottom Overlay "SDO" at 54.96,75.986 h0.76 r180; Bottom Overlay "SDI" at 54.96,74.716 h0.76 r180; Bottom Overlay "SCK" at 54.96,73.446 h0.76 r180; Bottom Overlay "CSN" at 54.96,72.176 h0.76 r180; Bottom Overlay "3V3" at 54.96,68.376 h0.76 r180; Bottom Overlay "CE" at 54.96,70.906 h0.76 r180